# EAGLE board PoppingElement-Reverse (EAGLE 6.5.0)
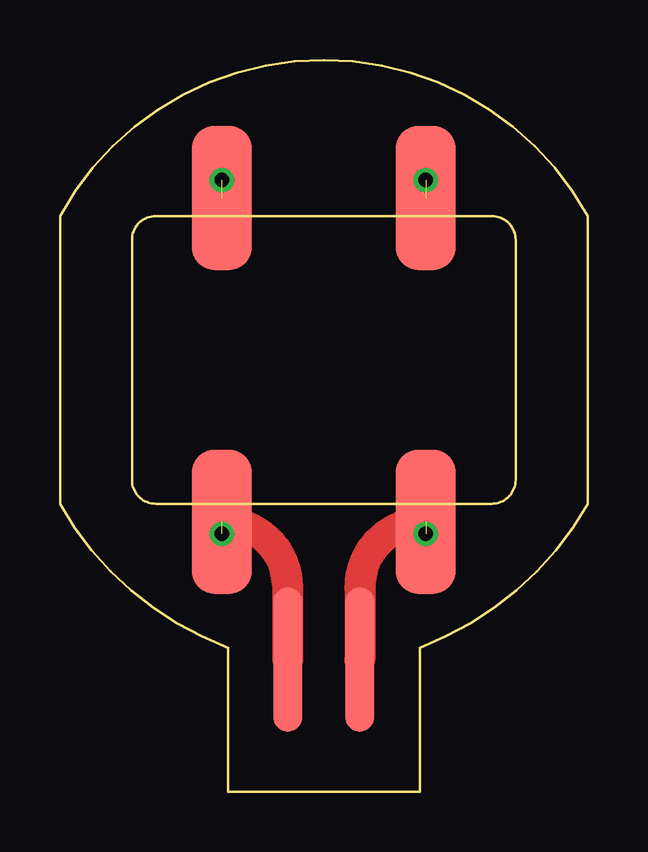
[diagram p0: board, top side]
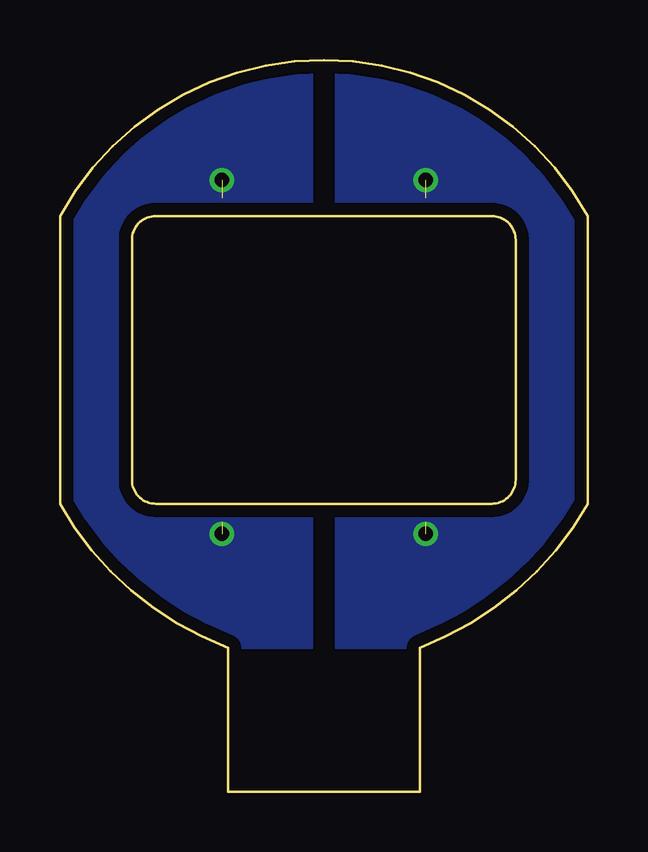
[diagram p1: board, bottom side, seen from below]

Size 22 x 30.5 mm. Coordinates in mm from the lower left corner, seen from the top.
Outline: 7,0 15,0 15,6 arc40 22,12 22,24 arc122 0,24 0,12 arc40 7,6 7,0
Outline: 4,24 18,24 arc-90 19,23 19,13 arc-90 18,12 4,12 arc-90 3,13 3,23 arc-90 4,24
Copper layers (1*16): Top 0.035mm / dielectric 1.5mm / Bottom 0.035mm
Design rules "default *": minimum track width 10mil, minimum drill 24mil, track to track 8mil, track to pad 8mil, pad to pad 8mil, via to via 8mil, smd to smd 8mil, copper to edge 0.5mm, drill to drill 8mil, minimum pad ring 10mil, minimum via ring 8mil, stop-mask expansion 4mil, vias tented up to drill 0mil, thermal gap 10mil

## Footprints (pad centres in the part's own frame; a part is rotated, then mirrored left to right if it is on the bottom)
CIGARETTE_LIGHTER = smd 2.5 x 6: P$1 -4.25,6.75; P$2 4.25,6.75; P$3 -4.25,-6.75; P$4 4.25,-6.75
PADS_2MMX2 = smd 1.2 x 6: P$1 1.5,0; P$2 -1.5,0

## Placement (x,y rotation side)
U$1  CIGARETTE_LIGHTER  [CIGARETTE_LIGHTER]  11,18 0 top
U$2  M02  [PADS_2MMX2]  11,5.5 0 top

## Library data of the parts
U$1 U$2 = blinkinlabs

## Nets
N$1: U$1.P$1 U$1.P$3 U$2.P$2
N$2: U$1.P$2 U$1.P$4 U$2.P$1

## Tracks (layer width: path | path; a pad name or v marks a point on that pad's centre or on a via)
N$1  (via drill 0.6)  (2 unrouted)
  Top 1.3: U$2.P$2 9.5,8.5 arc90 U$1.P$3
  other vias: 6.75,25.5 6.75,10.75
  pour Bottom: 10.5,6 7,6 4,7.5 1,10.5 0,12 0,24 2.25,27 2.5,27 4,28.25 5,29 7.5,30 10,30.5 10.5,30.75 10.5,24 3.5,24 3,23.5 3,12.5 3.5,12 10.5,12
N$2  (via drill 0.6)  (2 unrouted)
  Top 1.3: U$1.P$4 arc90 12.5,8.5 U$2.P$1
  other vias: 15.25,10.75 15.25,25.5
  pour Bottom: 11.5,6 15,6 18,7.5 21,10.5 22,12 22,24 19.75,27 19.5,27 18,28.25 17,29 14.5,30 12,30.5 11.5,30.75 11.5,24 18.5,24 19,23.5 19,12.5 18.5,12 11.5,12